# EAGLE board ConnectorBoardWithPowerJack (EAGLE 6.2)
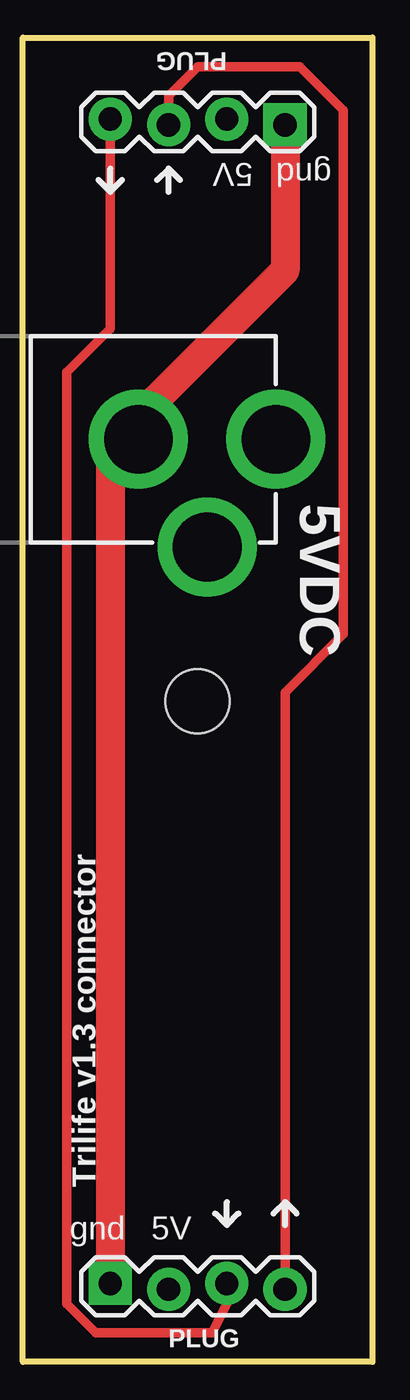
[diagram p0: board, top side]
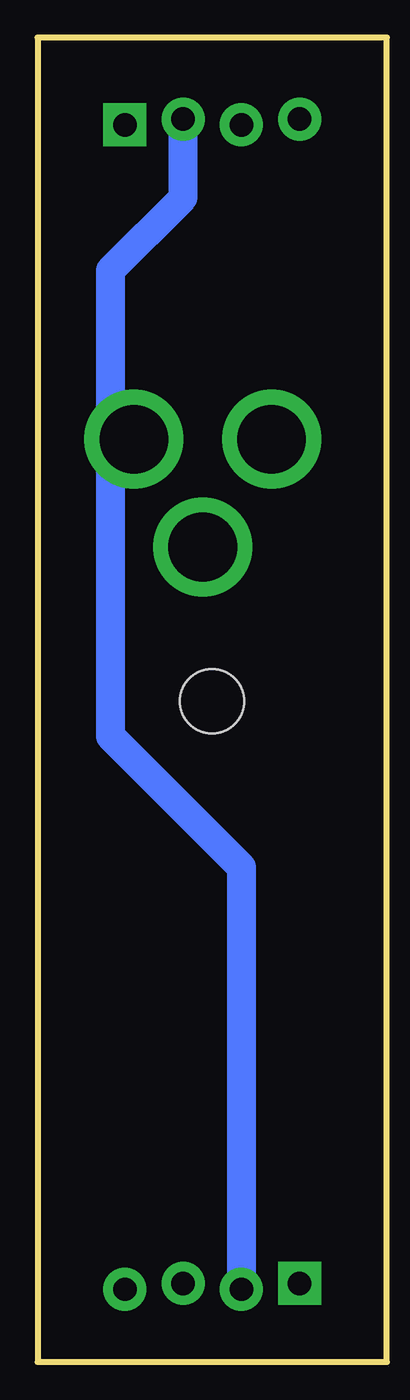
[diagram p1: board, bottom side, seen from below]

No outline drawn. Coordinates in mm, seen from the top.
Copper layers (1*16): Top 0.035mm / dielectric 1.5mm / Bottom 0.035mm
Design rules: minimum track width 10mil, minimum drill 24mil, track to track 8mil, track to pad 8mil, pad to pad 8mil, via to via 8mil, smd to smd 8mil, copper to edge 40mil, drill to drill 8mil, minimum pad ring 10mil, minimum via ring 8mil, stop-mask expansion 4mil, vias tented up to drill 0mil, thermal gap 10mil
Holes 2.8 mm at 8.26,29.46
Milling: 4 lines

## Footprints (pad centres in the part's own frame; a part is rotated, then mirrored left to right if it is on the bottom)
1X04_LOCK = drill 1.016 pad 1.88 square: 1 0,0.127 | drill 1.016 pad 1.88: 2 2.54,-0.127; 3 5.08,0.127; 4 7.62,-0.127
POWER_JACK_PTH = drill 2.997 pad 4.318: GND 0,7.7; GNDBREAK 4.7,10.7; PWR 0,13.7

## Placement (x,y rotation side)
E$1  [1X04_LOCK]  4.45,3.94 0 top
E$2  [1X04_LOCK]  12.06,54.74 180 top
J1  POWER_JACKPTH  [POWER_JACK_PTH]  -2.03,40.89 270 top

## Library data of the parts
E$1 E$2 J1 = SparkFun

## Nets
S$1: E$2.1
S$17: E$1.4 E$2.3
S$18: E$1.2

## Tracks (layer width: path | path; a pad name or v marks a point on that pad's centre or on a via)
S$1
  Top 1.27: E$2.1 12.06,48.26 4.45,40.64 4.45,3.81
S$2
  Top 0.406: 4.45,54.61 4.45,45.72 2.54,43.81 2.54,3.17 3.81,1.91 8.89,1.91 9.53,3.17 9.53,3.81
S$17
  Top 0.406: E$2.3 6.99,55.88 8.26,57.15 12.7,57.15 14.61,55.24 14.61,32.38 12.06,29.84 E$1.4
S$18
  Bottom 1.27: 9.53,54.61 9.53,51.44 12.7,48.26 12.7,27.94 6.99,22.23 E$1.2

## Text on the board
tPlace: PLUG | 5V | gnd | 5VDC | Trilife v1.3 connector | gnd | 5V | PLUG